# EAGLE board STM32F103CBT6_EAGLE (EAGLE 7.5.0)
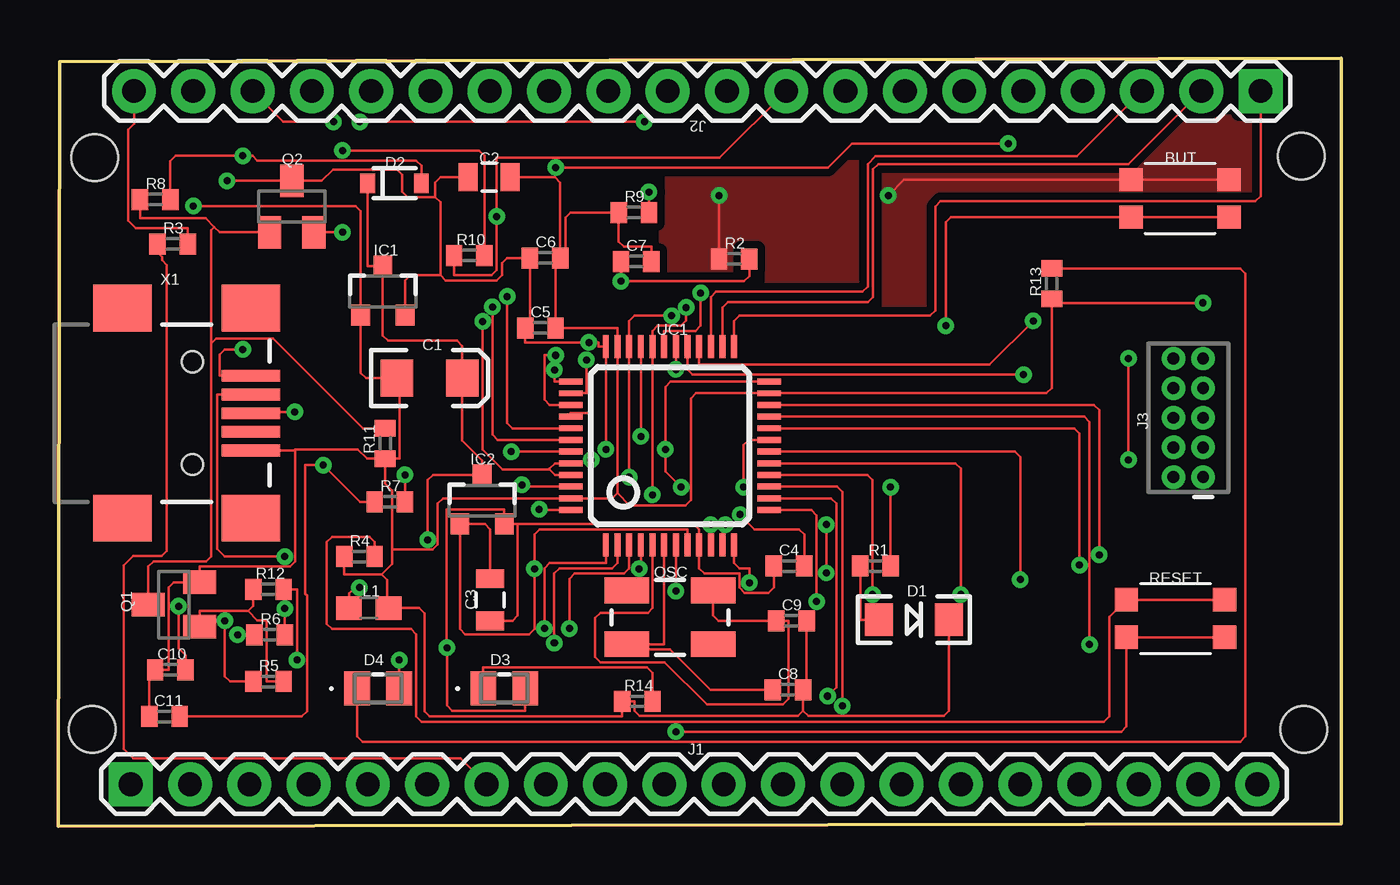
[diagram p0: board, top side]
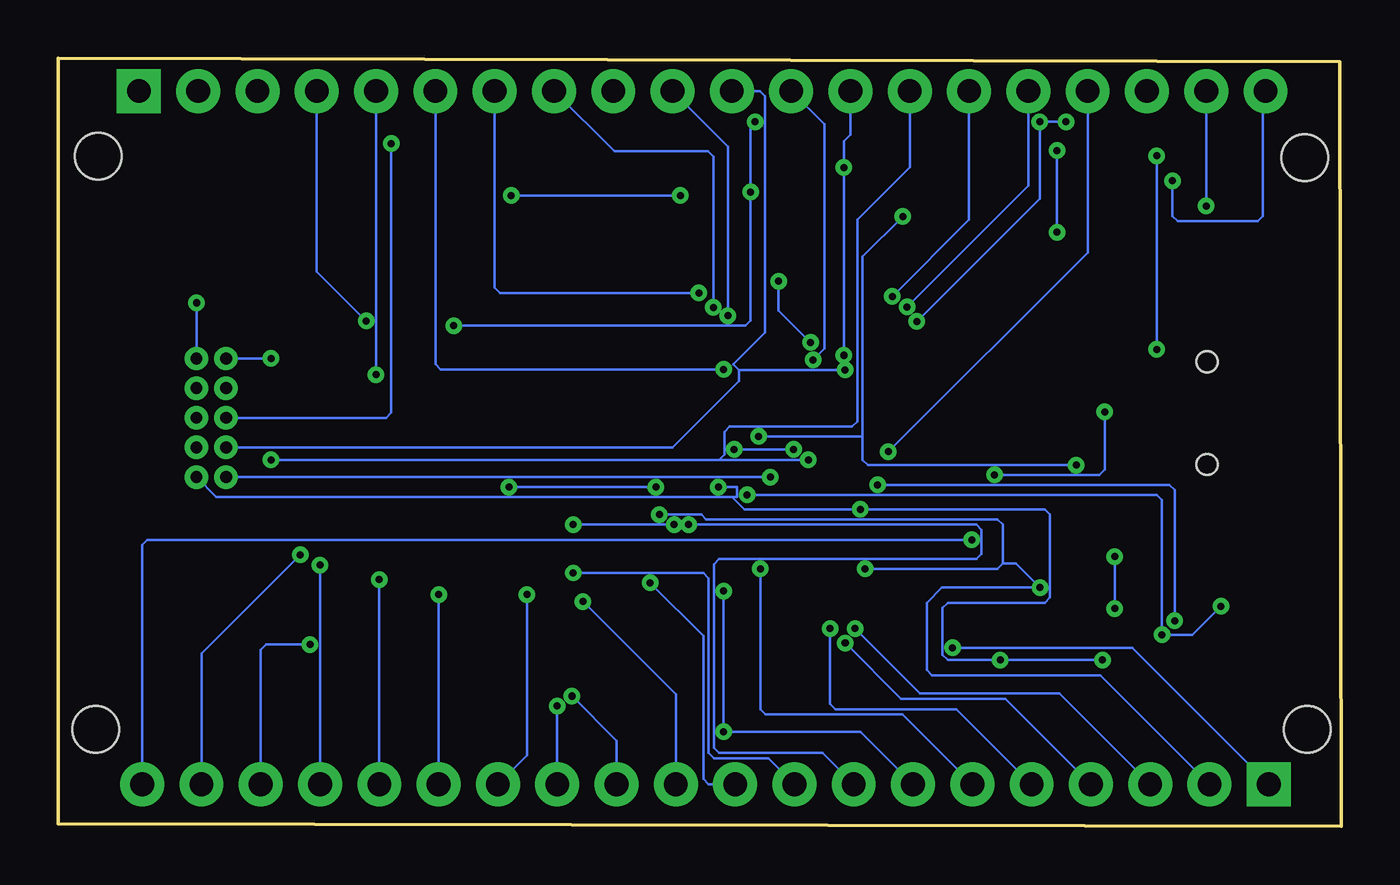
[diagram p1: board, bottom side, seen from below]

Size 54.95 x 32.9 mm. Coordinates in mm from the lower left corner, seen from the top.
Outline: 0.05,32.75 0,0 54.95,0.1 54.95,32.9 0.05,32.75
Copper layers (1*16): Üst 0.035mm / dielectric 1.5mm / Alt 0.035mm
Design rules "default *": minimum track width 10mil, minimum drill 0.61mm, track to track 8mil, track to pad 8mil, pad to pad 8mil, via to via 8mil, smd to smd 8mil, copper to edge 40mil, drill to drill 8mil, minimum pad ring 0mil, minimum via ring 8mil, stop-mask expansion 2mil, vias tented up to drill 12mil, thermal gap 10mil
Net classes: 0 default: width 0.1 mm, clearance 0.125 mm, clearance 0.125 mm to class 1; 1 vcc: width 0.254 mm, clearance 0.125 mm, clearance 0.125 mm to class 0
Holes 2 mm at 53.25,28.7 53.35,4.15 1.45,4.15 1.55,28.65

## Footprints (pad centres in the part's own frame; a part is rotated, then mirrored left to right if it is on the bottom)
PUSHBUTTON-KMR241GLFS = smd 1 x 1: P$1 2.1,0.8; P$2 2.1,-0.8; P$3 -2.1,0.8; P$4 -2.1,-0.8
EIA3216 = smd 1.4 x 1.6: A 1.4,0; C -1.4,0
0805 = smd 0.8 x 1.2: 1 -0.9,0; 2 0.9,0
C0402 = smd 0.7 x 0.9: 1 -0.65,0; 2 0.65,0
LED-1206 = smd 1.2 x 1.4: A -1.5,0; C 1.5,0
SOD-323 = smd 0.63 x 0.83: 1 -1.15,0; 2 1.15,0
LEDC2012X70N = smd 1.1 x 1.45: A 0.9,0; C -0.9,0
SOT23 = smd 0.8 x 0.9: 1 -0.95,-1; 2 0.95,-1; 3 0,1.1
1X20 = drill 1.016 pad 1.88 square: 1 0,0 | drill 1.016 pad 1.88: 2 2.54,0; 3 5.08,0; 4 7.62,0; 5 10.16,0; 6 12.7,0; 7 15.24,0; 8 17.78,0; 9 20.32,0; 10 22.86,0; 11 25.4,0; 12 27.94,0; 13 30.48,0; 14 33.02,0; 15 35.56,0; 16 38.1,0; 17 40.64,0; 18 43.18,0; 19 45.72,0; 20 48.26,0
2X5-PTH-1.27MM-NO_SILK = drill 0.508 pad 1: 1 -2.54,-0.635; 2 -2.54,0.635; 3 -1.27,-0.635; 4 -1.27,0.635; 5 0,-0.635; 6 0,0.635; 7 1.27,-0.635; 8 1.27,0.635; 9 2.54,-0.635; 10 2.54,0.635
0603 = smd 1.1 x 1: 1 -0.85,0; 2 0.85,0
CRYSTAL-SMD-5X3 = smd 1.9 x 1.1: 1 -1.85,-1.15; 2 1.85,-1.15; 3 1.85,1.15; 4 -1.85,1.15
SOT23_Q1 = smd 1 x 1.4: 1 -0.95,-1.1; 2 0.95,-1.1; 3 0,1.1
LQFP48 = smd 0.254 x 1: 1 -2.75,-4.25; 2 -2.25,-4.25; 3 -1.75,-4.25; 4 -1.25,-4.25; 5 -0.75,-4.25; 6 -0.25,-4.25; 7 0.25,-4.25; 8 0.75,-4.25; 9 1.25,-4.25; 10 1.75,-4.25; 11 2.25,-4.25; 12 2.75,-4.25; 25 2.75,4.25; 26 2.25,4.25; 27 1.75,4.25; 28 1.25,4.25; 29 0.75,4.25; 30 0.25,4.25; 31 -0.25,4.25; 32 -0.75,4.25; 33 -1.25,4.25; 34 -1.75,4.25; 35 -2.25,4.25; 36 -2.75,4.25 | smd 1 x 0.254: 13 4.25,-2.75; 14 4.25,-2.25; 15 4.25,-1.75; 16 4.25,-1.25; 17 4.25,-0.75; 18 4.25,-0.25; 19 4.25,0.25; 20 4.25,0.75; 21 4.25,1.25; 22 4.25,1.75; 23 4.25,2.25; 24 4.25,2.75; 37 -4.25,2.75; 38 -4.25,2.25; 39 -4.25,1.75; 40 -4.25,1.25; 41 -4.25,0.75; 42 -4.25,0.25; 43 -4.25,-0.25; 44 -4.25,-0.75; 45 -4.25,-1.25; 46 -4.25,-1.75; 47 -4.25,-2.25; 48 -4.25,-2.75
USB-MINIB = smd 2.5 x 0.5: D+ 2.5,0; D- 2.5,0.8; GND 2.5,-1.6; ID 2.5,-0.8; VBUS 2.5,1.6 | smd 2.5 x 2: GND.1 -3,-4.5; GND.2 -3,4.5; GND.3 2.5,4.5; GND.4 2.5,-4.5 | hole 0.9: 0,2.2; 0,-2.2

## Placement (x,y rotation side)
BUT  KMR211GLFS  [PUSHBUTTON-KMR241GLFS]  48.05,26.9 0 top
C1  100uF  [EIA3216]  15.9,19.2 0 top
C2  10uF  [0805]  18.45,27.8 0 top
C3  10uF  [0805]  18.5,9.7 90 top
C4  1uF  [C0402]  31.3,11.15 0 top
C5  1uF  [C0402]  20.65,21.35 0 top
C6  1uF  [C0402]  20.85,24.35 0 top
C7  1uF  [C0402]  24.75,24.2 0 top
C8  18pF  [C0402]  31.25,5.85 0 top
C9  18pF  [C0402]  31.4,8.8 0 top
C10  47pF  [C0402]  4.8,6.7 0 top
C11  47pF  [C0402]  4.55,4.7 0 top
D1  Blue  [LED-1206]  36.65,8.85 0 top
D2  DIODESOD (DIODE)  [SOD-323]  14.4,27.55 0 top
D3  598-8191-107F  [LEDC2012X70N]  19.1,5.9 0 top
D4  598-8170-107F  [LEDC2012X70N]  13.7,5.9 0 top
IC1  MCP1703T-3302E/CB  [SOT23]  13.9,22.9 0 top
IC2  MCP1703T-3302E/CB  [SOT23]  18.15,13.95 0 top
J1  M20  [1X20]  3.1,1.8 0 top
J2  M20  [1X20]  51.5,31.5 180 top
J3  CORTEX_DEBUG  [2X5-PTH-1.27MM-NO_SILK]  48.4,17.5 90 top
L1  ferrite bead  [0603]  13.3,9.35 0 top
OSC  8MHz  [CRYSTAL-SMD-5X3]  26.2,8.95 0 top
Q1  NPN-BJT  [SOT23_Q1]  4.95,9.5 90 top
Q2  NPN-BJT  [SOT23_Q1]  10,26.55 0 top
R1  1k  [C0402]  35,11.15 0 top
R2  1k  [C0402]  28.95,24.3 0 top
R3  10k  [C0402]  4.9,24.95 0 top
R4  1k  [C0402]  12.9,11.55 0 top
R5  1k  [C0402]  9,6.2 0 top
R6  22  [C0402]  9.05,8.2 0 top
R7  22  [C0402]  14.2,13.9 0 top
R8  10k  [C0402]  4.15,26.85 0 top
R9  10k  [C0402]  24.65,26.3 0 top
R10  1.5k  [C0402]  17.6,24.45 0 top
R11  36k  [C0402]  14,16.4 90 top
R12  47k  [C0402]  9,10.15 0 top
R13  330  [C0402]  42.55,23.25 90 top
R14  330  [C0402]  24.8,5.35 0 top
RESET  KMR211GLFS  [PUSHBUTTON-KMR241GLFS]  47.85,8.9 0 top
UC1  STM32F103CBT6  [LQFP48]  26.2,16.3 0 top
X1  USB-MINIB  [USB-MINIB]  5.75,17.7 0 top

## Library data of the parts
BUT C1-C11 D1 D2 IC1 IC2 J1-J3 L1 OSC Q1 Q2 R1-R14 RESET UC1 X1 = common
D3 = common; DESCRIPTION: Blue 473nm LED Indication - Discrete 3.2V 0805 (2012 Metric)
D4 = common; DESCRIPTION: Green 566nm LED Indication - Discrete 2V 0805 (2012 Metric)

## Nets
0: J1.19 UC1.22
1: J1.18 UC1.21
2: J1.17 UC1.20
3: J1.16 UC1.18
4: J1.15 UC1.17
5: J1.14 UC1.16
6: J1.13 UC1.15
7: J1.12 UC1.14
8: J1.11 UC1.13
9: J1.10 UC1.12
10: J1.9 UC1.11
11: J1.8 UC1.10
12: J1.6 UC1.4
13: J1.5 UC1.3
14: J1.4 UC1.2
15: J2.17 UC1.43
16: J2.16 UC1.42
17: J2.15 UC1.41
18: J2.14 J3.10 UC1.40
19: J2.13 J3.6 UC1.39
20: J2.12 UC1.38
21: J2.11 J3.4 UC1.37
22: J2.10 J3.2 UC1.34
23_USBDP: C11.2 J2.9 R7.1 R10.1 UC1.33
24_USBDM: C10.2 J2.8 R6.1 UC1.32
25: J2.7 UC1.31
26: J2.6 UC1.30
27: J2.5 UC1.29
28: J2.4 UC1.28
29: J2.3 UC1.27
30: J2.2 UC1.26
31: J2.1 UC1.25
32: BUT.P$2 BUT.P$4 J2.18 R9.2 UC1.44 UC1.45
33: R1.2 UC1.19
+5V/2: D2.2 R8.2 X1.VBUS
AV+: C3.1 C4.1 D3.A IC2.2 J1.1 UC1.9
AV-: C3.2 C4.2 IC2.1 J1.2 L1.1 UC1.8
DGND: C1.C C2.2 C5.2 C6.2 C7.2 C8.2 C9.2 C10.1 C11.1 D1.C IC1.1 J2.19 J3.3 J3.5 J3.9 L1.2 Q1.2 R4.1 R9.1 R11.1 R13.1 R14.1 UC1.23 UC1.35 UC1.47 X1.GND
DISC: R5.1 UC1.46
N$1: BUT.P$1 BUT.P$3 R2.1
N$2: D1.A R1.1
N$4: R4.2 RESET.P$1 RESET.P$3
N$51: Q2.2 R10.2
N$59: R6.2 X1.D-
N$60: R7.2 X1.D+
N$71: Q1.3 Q2.1 R8.1 R11.2
N$73: Q1.1 R5.2 R12.1
Net_53: D4.C R13.2
Net_55: D3.C R14.2
OSC_IN: C9.1 OSC.3 UC1.5
OSC_OUT: C8.1 OSC.1 UC1.6
RESET: J1.7 R3.1 RESET.P$2 RESET.P$4 UC1.7
VBAT: J1.3 UC1.1
VCC: C2.1 C5.1 C6.1 C7.1 D4.A IC1.2 J2.20 J3.1 Q2.3 R2.2 R3.2 R12.2 UC1.24 UC1.36 UC1.48
VIN: C1.A D2.1 IC1.3 IC2.3 J1.20

## Tracks (layer width: path | path; a pad name or v marks a point on that pad's centre or on a via)
0  (via drill 0.3 pad 0.5)
  Üst 0.1: v44.59,11.62 44.59,17.83 44.36,18.05 UC1.22
  Alt 0.1: v44.59,11.62 48.82,7.4 J1.19
1  (via drill 0.3 pad 0.5)
  Üst 0.1: v44.17,7.78 44.17,17.33 43.94,17.55 UC1.21
  Alt 0.1: J1.18 46.28,7.56 46.05,7.78 v44.17,7.78
2  (via drill 0.3 pad 0.5)
  Üst 0.1: v43.74,11.19 43.74,16.83 43.52,17.05 UC1.20
  Alt 0.1: v43.74,11.19 J1.17
3  (via drill 0.3 pad 0.5)
  Üst 0.1: v41.2,10.57 41.2,15.83 40.98,16.05 UC1.18
  Alt 0.1: v41.2,10.57 J1.16
4  (via drill 0.3 pad 0.5)
  Üst 0.1: v38.66,9.93 38.66,15.33 38.43,15.55 UC1.17
  Alt 0.1: v38.66,9.93 J1.15
5  (via drill 0.3 pad 0.5)
  Üst 0.1: v34.88,9.93 34.88,14.83 34.65,15.05 UC1.16
  Alt 0.1: v34.88,9.93 34.88,3.05 J1.14
6  (via drill 0.3 pad 0.5)
  Üst 0.1: v33.58,5.15 33.58,14.33 33.36,14.55 UC1.15
  Alt 0.1: v33.58,5.15 J1.13
7  (via drill 0.3 pad 0.5)
  Üst 0.1: v32.95,5.58 33.33,5.95 33.33,13.83 33.1,14.05 UC1.14
  Alt 0.1: v32.95,5.58 31.04,3.66 J1.12
8  (via drill 0.3 pad 0.5)
  Üst 0.1: v32.47,9.62 32.47,13.33 32.25,13.55 UC1.13
  Alt 0.1: v32.47,9.62 28.5,5.65 J1.11
9  (via drill 0.3 pad 0.5)
  Üst 0.1: v29.6,10.43 29.6,11.05 29.17,11.05 28.95,11.28 UC1.12
  Alt 0.1: v29.6,10.43 27.33,8.15 27.33,2.03 27.1,1.8 J1.10
10  (via drill 0.3 pad 0.5)
  Üst 0.1: v32.9,10.85 v32.9,12.93 | v28.58,12.93 28.45,12.8 UC1.11
  Alt 0.1: v32.9,12.93 v28.58,12.93 | v32.9,10.85 27.33,10.85 27.1,10.63 27.1,3.14 26.88,2.92 24.53,2.92 J1.9
11  (via drill 0.3 pad 0.5)
  Üst 0.1: UC1.10 v27.95,12.93
  Alt 0.1: v27.95,12.93 15.62,12.93 15.4,12.7 15.4,11.68 15.62,11.45 26.65,11.45 26.88,11.23 26.88,3.37 26.65,3.14 22.22,3.14 J1.8
12  (via drill 0.3 pad 0.5)
  Üst 0.1: v24.88,11.03 24.95,11.1 UC1.4
  Alt 0.1: v24.88,11.03 24.88,5.01 24.65,4.79 18.79,4.79 J1.6
13  (via drill 0.3 pad 0.5)
  Üst 0.1: v21.89,8.48 21.89,10.6 22.12,10.83 24.22,10.83 24.45,11.05 UC1.3
  Alt 0.1: v21.89,8.48 21.89,5.24 21.67,5.01 16.47,5.01 J1.5
14  (via drill 0.3 pad 0.5)
  Üst 0.1: v21.24,7.85 21.24,10.83 21.47,11.05 23.72,11.05 23.95,11.28 UC1.2
  Alt 0.1: v21.24,7.85 18.86,5.46 14.38,5.46 J1.4
15  (via drill 0.3 pad 0.5)
  Üst 0.1: UC1.43 v19.39,16.05
  Alt 0.1: v19.39,16.05 10.86,24.59 J2.17
16  (via drill 0.3 pad 0.5)
  Üst 0.1: v18.6,22.25 18.6,16.78 18.83,16.55 UC1.42
  Alt 0.1: v18.6,22.25 13.4,27.45 J2.16
17  (via drill 0.3 pad 0.5)
  Üst 0.1: v19.22,22.7 19.22,17.28 19.45,17.05 UC1.41
  Alt 0.1: v19.22,22.7 15.94,25.98 J2.15
18  (via drill 0.3 pad 0.5)
  Üst 0.1: v22.83,15.7 22.83,17.75 22.77,17.7 21.95,17.7 UC1.40 | v45.84,15.7 v45.84,20.04
  Alt 0.1: v45.84,15.7 26.65,15.7 | 26.65,15.7 26.42,15.93 26.42,16.9 26.2,17.12 20.95,17.12 20.73,17.35 20.73,25.99 18.48,28.23 J2.14 | J3.10 v45.84,20.04 | 26.65,15.7 26.42,15.7 | 26.42,15.7 | 26.42,15.7 v22.83,15.7
19  (via drill 0.3 pad 0.5)
  Üst 0.1: v21.3,28.23 32.98,28.23 34,29.25 v40.69,29.25 | v21.3,20.18 20.83,20.18 20.83,18.28 21.05,18.05 UC1.39
  Alt 0.1: v40.69,29.25 40.69,17.73 40.92,17.5 J3.6 | J2.13 21.02,29.64 21.3,29.36 v21.3,28.23 v21.3,20.18
20  (via drill 0.3 pad 0.5)
  Üst 0.1: v22.62,19.98 22.62,18.55 UC1.38
  Alt 0.1: v22.62,19.98 22.13,20.47 22.13,30.08 J2.12
21  (via drill 0.3 pad 0.5)
  Üst 0.1: v21.25,19.55 21.25,19.05 UC1.37
  Alt 0.1: J2.11 24.9,31.5 24.67,31.28 24.67,21.15 26.02,19.8 26.02,19.78 25.8,19.55 | 25.8,19.55 25.8,19.06 28.63,16.23 J3.4 | 25.8,19.55 | 25.8,19.55 v21.25,19.55
22  (via drill 0.3 pad 0.5)
  Üst 0.1: v26.27,21.88 24.67,21.88 24.45,21.65 UC1.34 v24.45,14.96
  Alt 0.1: J3.2 v24.45,14.96 | v26.27,21.88 26.27,29.13 J2.10
23_USBDP  (via drill 0.3 pad 0.5)
  Üst 0.1: R10.1 16.95,23.61 18.55,23.61 18.77,23.83 v18.77,26.12 18.77,28.65 28.33,28.65 J2.9 | C11.2 10.42,4.7 10.65,4.93 10.65,9.89 10.58,9.96 10.58,15.48 v11.35,15.48 12.92,13.9 R7.1 | UC1.33 v24.95,16.7
  Alt 0.1: v11.35,15.48 20.28,15.48 20.5,15.7 20.5,16.7 | 20.5,16.7 20.5,24.4 v18.77,26.12 | 20.5,16.7 | 20.5,16.7 v24.95,16.7
24_USBDM  (via drill 0.3 pad 0.5)
  Üst 0.1: v5.15,9.43 5.15,7.62 5.45,7.33 C10.2 | v7.67,8.2 R6.1 | v26.89,22.22 26.89,21.68 26.67,21.45 25.67,21.45 25.45,21.23 UC1.32 v25.45,14.2
  Alt 0.1: v26.89,22.22 26.89,28.69 27.12,28.91 31.13,28.91 J2.8 | v25.45,14.2 7.9,14.2 7.67,13.98 v7.67,8.2 6.38,8.2 v5.15,9.43
25  (via drill 0.3 pad 0.5)
  Üst 0.1: v27.52,22.85 27.52,21.45 27.29,21.23 25.95,21.23 UC1.31
  Alt 0.1: v27.52,22.85 36.03,22.85 36.26,23.07 J2.7
26  (via drill 0.3 pad 0.5)
  Üst 0.1: UC1.30 v26.45,19.58
  Alt 0.1: v26.45,19.58 38.58,19.58 38.8,19.8 J2.6
27  (via drill 0.3 pad 0.5)
  Üst 0.1: v41.34,19.35 27.17,19.35 26.95,19.58 UC1.29
  Alt 0.1: J2.5 v41.34,19.35
28  (via drill 0.3 pad 0.5)
  Üst 0.1: v41.77,21.65 39.89,19.78 27.45,19.78 UC1.28
  Alt 0.1: v41.77,21.65 43.88,23.77 J2.4
29
  Üst 0.1: UC1.27 27.95,22.68 28.17,22.9 34.45,22.9 34.68,23.12 34.68,28.38 35,28.7 43.62,28.7 J2.3
30
  Üst 0.1: UC1.26 28.45,22.23 28.67,22.45 34.68,22.45 34.9,22.68 34.9,28.15 35.13,28.38 45.83,28.38 J2.2
31
  Üst 0.1: UC1.25 28.95,21.65 29.17,21.88 37.34,21.88 37.56,22.1 37.56,26.55 37.79,26.78 51.27,26.78 51.5,27 J2.1
32  (via drill 0.3 pad 0.5)
  Üst 0.1: UC1.45 21.27,15.05 21.05,15.28 | 21.05,15.28 21.05,15.33 21.27,15.55 UC1.44 | v11.79,30.19 9.63,30.19 J2.18 | v12.91,30.19 v25.1,30.19 | v25.3,27.18 R9.2 | 21.05,15.28 19.04,15.28 18.17,16.14 v18.17,21.62 | BUT.P$2 BUT.P$4 38.24,26.1 38.01,25.88 v38.01,21.45
  Alt 0.1: v18.17,21.62 12.91,26.89 v12.91,30.19 v11.79,30.19 | v38.01,21.45 25.52,21.45 25.3,21.68 v25.3,27.18 25.3,29.99 v25.1,30.19
33  (via drill 0.3 pad 0.5)
  Üst 0.1: R1.2 v35.65,14.54 | v29.35,14.54 29.35,16.33 29.58,16.55 UC1.19
  Alt 0.1: v29.35,14.54 v35.65,14.54
+5V/2  (via drill 0.3 pad 0.5)
  Üst 0.1: R8.2 4.8,28.5 5.02,28.73 v7.89,28.73 8.32,28.73 8.52,28.53 15.33,28.53 15.55,28.3 D2.2 | v7.89,20.43 7.13,20.43 6.9,20.2 6.9,19.3 X1.VBUS
  Alt 0.1: v7.89,28.73 v7.89,20.43
AV+  (via drill 0.3 pad 0.5)
  Üst 0.1: C4.1 30.65,10.23 30.42,10 29.4,10 29.17,10.23 29.17,10.83 27.67,10.83 27.45,11.05 UC1.9 27.45,12.73 27.22,12.95 19.67,12.95 | D3.A 20,4.95 16.88,4.95 16.65,5.18 v16.65,7.65 16.62,7.68 16.62,13.58 19.1,13.58 IC2.2 19.67,12.95 | 19.67,12.95 19.67,9.03 19.45,8.8 C3.1
  Alt 0.1: v16.65,7.65 8.95,7.65 J1.1
AV-  (via drill 0.3 pad 0.5)
  Üst 0.1: C3.2 18.5,12.73 18.27,12.95 IC2.1 17.2,8.45 17.42,8.23 20.17,8.23 20.39,8.45 v20.39,11.03 20.39,12.5 20.62,12.73 26.95,12.73 UC1.8 | v29.2,13.35 29.83,12.73 31.72,12.73 31.95,12.5 C4.2 | v12.9,10.23 12.7,10.23 12.45,9.98 L1.1
  Alt 0.1: v29.2,13.35 27.4,13.35 27.2,13.15 14.72,13.15 14.5,12.93 14.5,11.25 | 14.5,11.25 13.92,11.25 v12.9,10.23 17.1,10.23 17.75,9.58 17.75,6.69 17.52,6.47 10.31,6.47 J1.2 | v20.39,11.03 14.72,11.03 14.5,11.25
DGND  (via drill 0.3 pad 0.5)
  Üst 0.1: C11.1 3.9,6.7 C10.1 4.72,6.7 4.72,10.23 4.95,10.45 Q1.2 6.05,11.12 9.92,11.12 10.15,11.35 10.15,16.1 | C2.2 21.27,27.8 21.5,27.58 C6.2 | R4.1 12.25,10.78 13.85,10.78 | 13.85,10.78 14.08,10.56 14.08,9.35 L1.2 15.46,9.35 15.69,9.12 15.69,4.93 15.91,4.7 24.15,4.7 R14.1 24.67,5.35 24.67,4.95 24.9,4.73 31.67,4.73 31.9,4.95 | 10.15,16.1 10.15,16.15 12.83,16.15 13.22,15.75 R11.1 | 23.95,14.28 UC1.35 23.95,21.35 C5.2 21.3,24.12 | 23.95,14.28 24.48,13.75 26.87,13.75 27.1,13.97 27.1,18.33 27.32,18.55 UC1.23 42.33,18.55 42.55,18.78 R13.1 | 31.9,4.95 32.12,4.73 37.92,4.73 38.15,4.95 D1.C | 14.3,11.85 16.02,11.85 16.25,12.08 16.25,13.83 16.47,14.05 UC1.47 23.72,14.05 23.95,14.28 | 14.3,11.85 14.3,14.38 14,14.68 R11.1 | v5.78,26.58 12.72,26.58 12.95,26.35 IC1.1 12.95,19.43 13.17,19.2 C1.C 14.62,19.2 14.62,15.75 R11.1 | 10.15,16.1 X1.GND | X1.GND | R13.1 42.75,22.43 | 42.75,22.43 v49.04,22.43 | R13.1 42.75,22.43 | 42.75,22.43 R13.1 | C6.2 21.3,24.12 | C6.2 21.3,24.12 | 21.3,24.12 C6.2 | 31.9,4.95 C8.2 32.05,5.85 C9.2 | 13.85,10.78 14.3,11.23 14.3,11.85 | C7.2 25.4,24.83 24.22,24.83 24,25.05 R9.1 21.95,26.3 21.72,26.08 21.72,24.35 C6.2
  Alt 0.1: J3.9 v49.04,22.43 | J2.19 v5.78,26.58
DISC  (via drill 0.3 pad 0.5)
  Üst 0.1: v7.12,8.8 7.12,6.43 7.35,6.2 R5.1 | UC1.46 19.86,14.55 v19.86,14.62
  Alt 0.1: v19.86,14.62 7.35,14.62 7.12,14.4 v7.12,8.8
N$1  (via drill 0.3 pad 0.5)
  Üst 0.1: BUT.P$1 BUT.P$3 36.23,27.7 v35.55,27.03 | R2.1 v28.3,27.03
  Alt 0.1: v28.3,27.03 v35.55,27.03
N$1
  pour Üst (isolate 0.33, no thermals): 2.82,31.28 3.02,1.92 51.73,1.97 51.73,31.58
N$2
  Üst 0.1: D1.A 34.35,8.85 R1.1
N$4
  Üst 0.1: RESET.P$1 RESET.P$3 45.02,8.97 45.02,4.7 44.79,4.48 15.55,4.48 15.33,4.7 15.33,8.23 15.1,8.45 11.72,8.45 11.5,8.68 11.5,12.18 11.72,12.4 13.33,12.4 13.55,12.18 R4.2
N$51  (via drill 0.3 pad 0.5)
  Üst 0.1: v12.17,25.45 Q2.2 | v12.17,28.95 18.02,28.95 18.25,28.73 R10.2
  Alt 0.1: v12.17,28.95 v12.17,25.45
N$59  (via drill 0.3 pad 0.5)
  Üst 0.1: v9.7,11.55 7.13,11.55 6.8,11.88 6.8,18.5 X1.D- | v9.7,9.33 R6.2
  Alt 0.1: v9.7,9.33 v9.7,11.55
N$60  (via drill 0.3 pad 0.5)
  Üst 0.1: R7.2 v14.85,15.05 | v10.12,17.75 8.25,17.75 X1.D+
  Alt 0.1: v10.12,17.75 10.12,15.28 10.35,15.05 v14.85,15.05
N$71
  Üst 0.1: R11.2 13.06,17.05 9.21,20.9 6.76,20.9 6.55,20.69 | 6.55,20.69 6.55,11.56 6.34,11.35 4.08,11.35 3.85,11.12 Q1.3 | 6.55,20.69 6.55,25.55 6.68,25.68 | 6.68,25.68 6.3,26.05 3.5,26.05 R8.1 | 6.68,25.68 6.9,25.45 Q2.1
N$73
  Üst 0.1: Q1.1 6.05,9.23 8.12,9.23 | 8.12,9.23 8.52,8.83 8.92,8.83 8.92,6.2 R5.2 | 8.12,9.23 8.35,9.45 R12.1
Net_53
  Üst 0.1: R13.2 50.62,23.9 50.85,23.68 50.85,3.85 50.62,3.62 13.02,3.62 12.8,3.85 D4.C
Net_55
  Üst 0.1: D3.C 18.2,6.8 25.22,6.8 25.45,6.58 R14.2
OSC_IN
  Üst 0.1: OSC.3 28.05,9.03 28.27,8.8 C9.1 31.27,8.8 31.27,5.45 31.05,5.23 27.77,5.23 25.97,7.03 23.22,7.03 23,7.25 23,8.93 23.22,9.15 25.25,9.15 25.45,9.35 UC1.5
OSC_OUT
  Üst 0.1: UC1.6 25.95,7.8 25.7,7.8 | 25.7,7.8 | 25.7,7.8 OSC.1 24.35,7.58 26.2,7.58 27.92,5.85 C8.1
RESET  (via drill 0.3 pad 0.5)
  Üst 0.1: J1.7 17.22,2.92 3.2,2.92 2.8,3.31 2.8,11.18 3.2,11.58 4.42,11.58 4.65,11.8 4.65,24.05 4.45,24.25 4.45,24.38 4.25,24.58 R3.1 | RESET.P$2 RESET.P$4 45.75,4.28 45.52,4.05 v26.45,4.05 | UC1.7 v26.45,10.07
  Alt 0.1: J1.7 20.59,4.05 v26.45,4.05 v26.45,10.07
VBAT  (via drill 0.3 pad 0.5)
  Üst 0.1: v20.82,8.48 20.82,11.05 21.04,11.28 23.45,11.28 UC1.1
  Alt 0.1: v20.82,8.48 18.03,5.69 12.07,5.69 J1.3
VCC  (via drill 0.3 pad 0.5)
  Üst 0.1: C2.1 16.36,27.8 16.14,27.58 16.14,26.96 | 16.14,26.96 16.36,26.74 16.36,23.61 | 16.36,23.61 15.08,23.61 14.85,23.38 IC1.2 | C7.1 v24.1,23.35 29.38,23.35 29.6,23.58 R2.2 | v26.67,14.54 26,15.21 v26,16.14 26,18.83 26.22,19.05 UC1.24 | D4.A v14.6,7.12 | J2.20 3.24,30.09 3,29.85 3,25.94 3.31,25.62 5.55,25.62 R3.2 | 16.14,26.96 14.96,26.96 14.73,27.19 14.73,27.92 14.51,28.14 11.77,28.14 11.28,27.65 Q2.3 v7.22,27.65 | v10.22,7.12 10.22,10.15 R12.2 | 16.36,23.61 16.59,23.38 18.77,23.38 19,23.61 19,24.12 19.22,24.35 C6.1 20.2,21.35 C5.1 20,20.73 v22.72,20.73 23.15,20.73 23.15,20.55 UC1.36 v23.45,16.14 | v20.6,13.58 20.62,13.55 UC1.48
  Alt 0.1: v10.22,7.12 v14.6,7.12 16.85,7.12 17.08,7.34 17.08,9.35 16.85,9.58 12.7,9.58 12.47,9.8 12.47,13.35 12.7,13.58 v20.6,13.58 25.56,13.58 26.1,14.11 | J2.20 3.35,31.5 3.35,26.14 3.56,25.93 7,25.93 7.22,26.15 v7.22,27.65 | v24.1,23.35 24.1,22.1 v22.72,20.73 | v26,16.14 v23.45,16.14 | 26.1,14.11 48.18,14.11 J3.1 | v26.67,14.54 25.88,14.54 25.88,14.11 26.1,14.11
VIN  (via drill 0.3 pad 0.5)
  Üst 0.1: v15.83,12.28 15.83,14.83 16.05,15.05 IC2.3 18.15,15.68 17.3,16.53 C1.A 17.3,20.58 17.08,20.81 14.12,20.81 13.9,21.03 IC1.3 13.25,24 D2.1
  Alt 0.1: v15.83,12.28 51.14,12.28 51.36,12.05 J1.20

## Text on the board
tPlace: J2 | Q2 | D2 | C2 | BUT | R8 | R9 | R3 | R10 | C6 | IC1 | C7 | R2 | X1 | R13 | C5 | UC1 | C1 | J3 | R11 | IC2 | R7 | R4 | C4 | R1 | R12 | L1 | OSC | D1 | RESET | Q1 | C3 | C9 | R6 | C10 | D4 | D3 | R5 | C8 | C11 | R14 | J1
tDocu: STM32F103CBT6 ARM GELİŞTİRME KARTI | v.1.06 MURAT IRKAN 2022/10